# EAGLE board LeftHandPath_Panel (EAGLE 9.6.2)
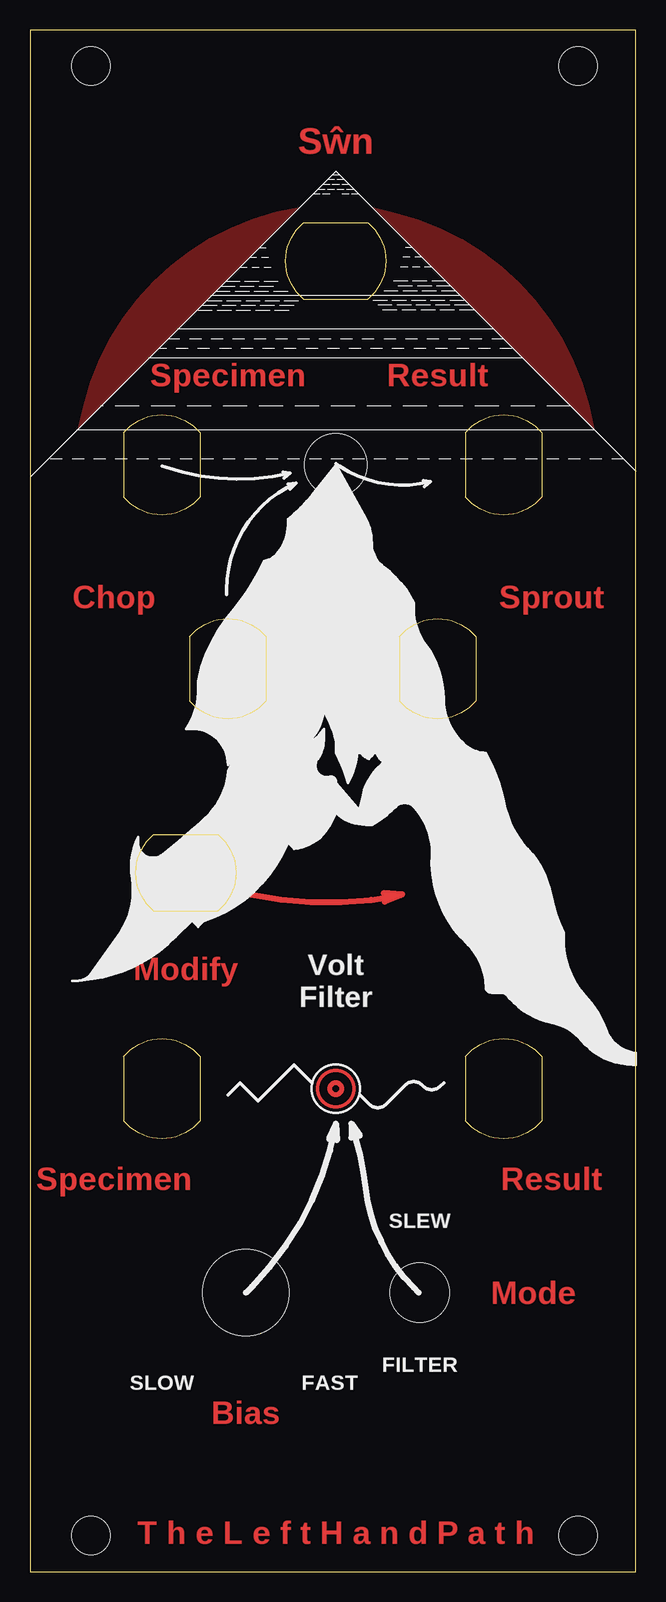
[diagram p0: board, top side]
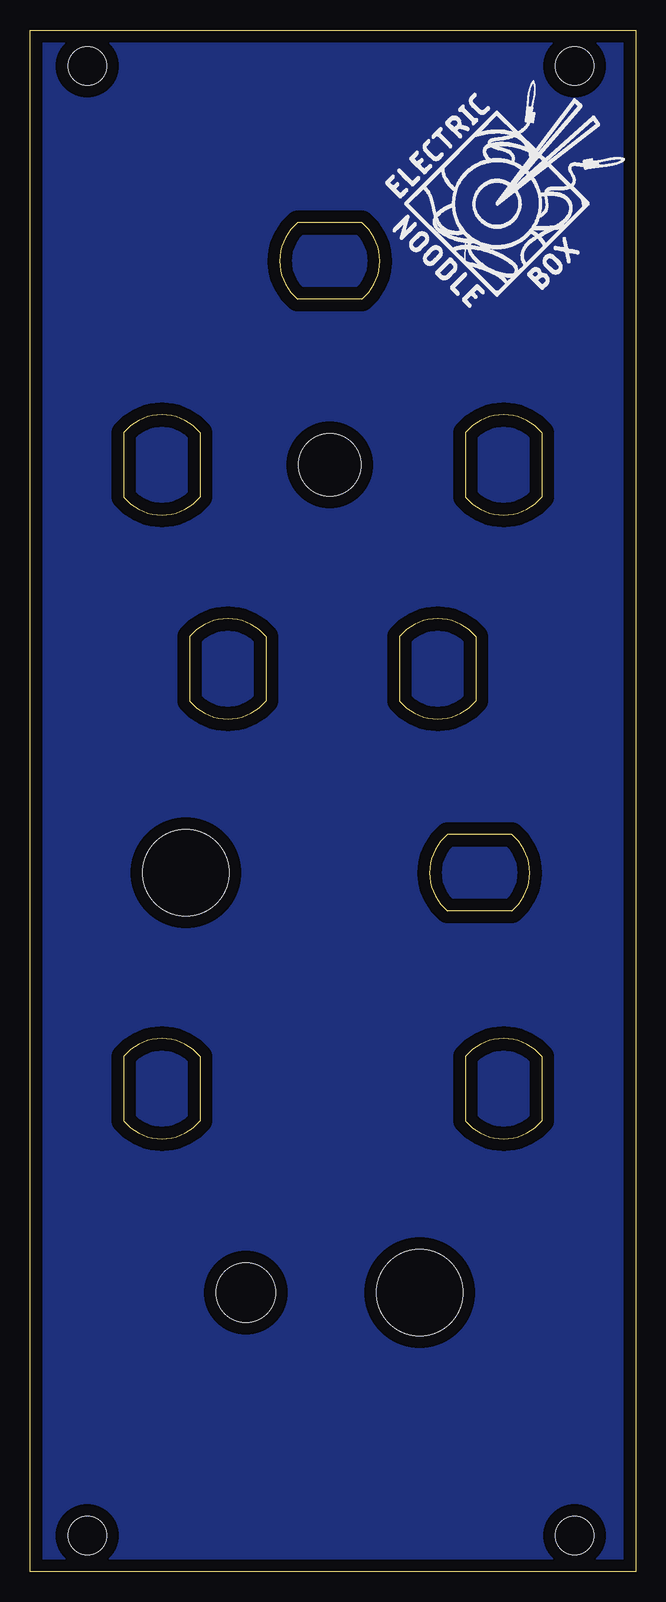
[diagram p1: board, bottom side, seen from below]

Size 50.5 x 128.5 mm. Coordinates in mm from the lower left corner, seen from the top.
Outline: 0,0 50.5,0 50.5,128.5 0,128.5 0,0
Copper layers (1*16): Top 0.035mm / dielectric 1.5mm / Bottom 0.035mm
Design rules "default": minimum track width 6mil, minimum drill 0.35mm, track to track 6mil, track to pad 6mil, pad to pad 6mil, via to via 6mil, smd to smd 6mil, copper to edge 40mil, drill to drill 6mil, minimum pad ring 10mil, minimum via ring 8mil, stop-mask expansion 4mil, vias tented up to drill 0mil, thermal gap 10mil
Holes 3.2 mm at 5.08,3 45.72,3 5.08,125.5 45.72,125.5
Holes 5.2 mm at 25.5,92.25

## Footprints (pad centres in the part's own frame; a part is rotated, then mirrored left to right if it is on the bottom)
ALPHA9MM_POT_CUTOUT = hole 7.2: 0,0
DW1_SWITCH_CUTOUT = hole 4.95: 0,0

## Placement (x,y rotation side)
E$1  [CINCH_BANANA_CUTOUT]  25.5,109.25 90 top
E$2  [CINCH_BANANA_CUTOUT]  11,92.25 0 top
E$3  [CINCH_BANANA_CUTOUT]  39.5,92.25 0 top
E$4  [CINCH_BANANA_CUTOUT]  16.5,75.25 0 top
E$5  [CINCH_BANANA_CUTOUT]  34,75.25 0 top
E$6  [CINCH_BANANA_CUTOUT]  13,58.25 90 top
E$7  [CINCH_BANANA_CUTOUT]  11,40.25 0 top
E$8  [CINCH_BANANA_CUTOUT]  39.5,40.25 0 top
E$9  [ALPHA9MM_POT_CUTOUT]  37.5,58.25 0 top
E$10  [ALPHA9MM_POT_CUTOUT]  18,23.25 0 top
E$11  [DW1_SWITCH_CUTOUT]  32.5,23.25 0 top
E$12  [LOGO20X20]  20.9,104.85 0 bottom

## Library data of the parts
E$1-E$12 = ElectricNoodleBox

## Tracks (layer width: path | path; a pad name or v marks a point on that pad's centre or on a via)
GND
  pour Bottom: 0,-0.25 50.5,-0.25 50.5,128.75 0,128.75
S$2
  pour Top: 22.5,113.75 4,95.25 4.5,97.25 arc-67
S$3
  pour Top: 47,95.25 28.5,113.75 30.5,113.25 arc-67
S$4
  Top 0.5: 12.95,58.1 13.6,57.85 arc33 30.95,56.4
S$5
  Top 0.5: 31,56.45 29.5,56.55
S$6
  Top 0.5: 31.05,56.45 29.6,55.85
(copper drawn outside any net)
  shapes: Top circle x2

## Text on the board
Top: Sŵn | Specimen | Result | Chop | Sprout | Modify | Specimen | Result | Mode | Bias | T h e L e f t H a n d P a t h
tPlace: Volt / Filter | SLEW | FILTER | SLOW | FAST
tStop: PICWS DU | Sŵn | Specimen | Result | Volt / Sampler | Chop | Sprout | F / O / E / L / / F / R / A / I / T / H | P / E / N / / Y / / F / A / N | Modify | Specimen | Result | Mode | Bias | T h e L e f t H a n d P a t h